# EAGLE board supply LF (tugas nanang) (EAGLE 7.5.0)
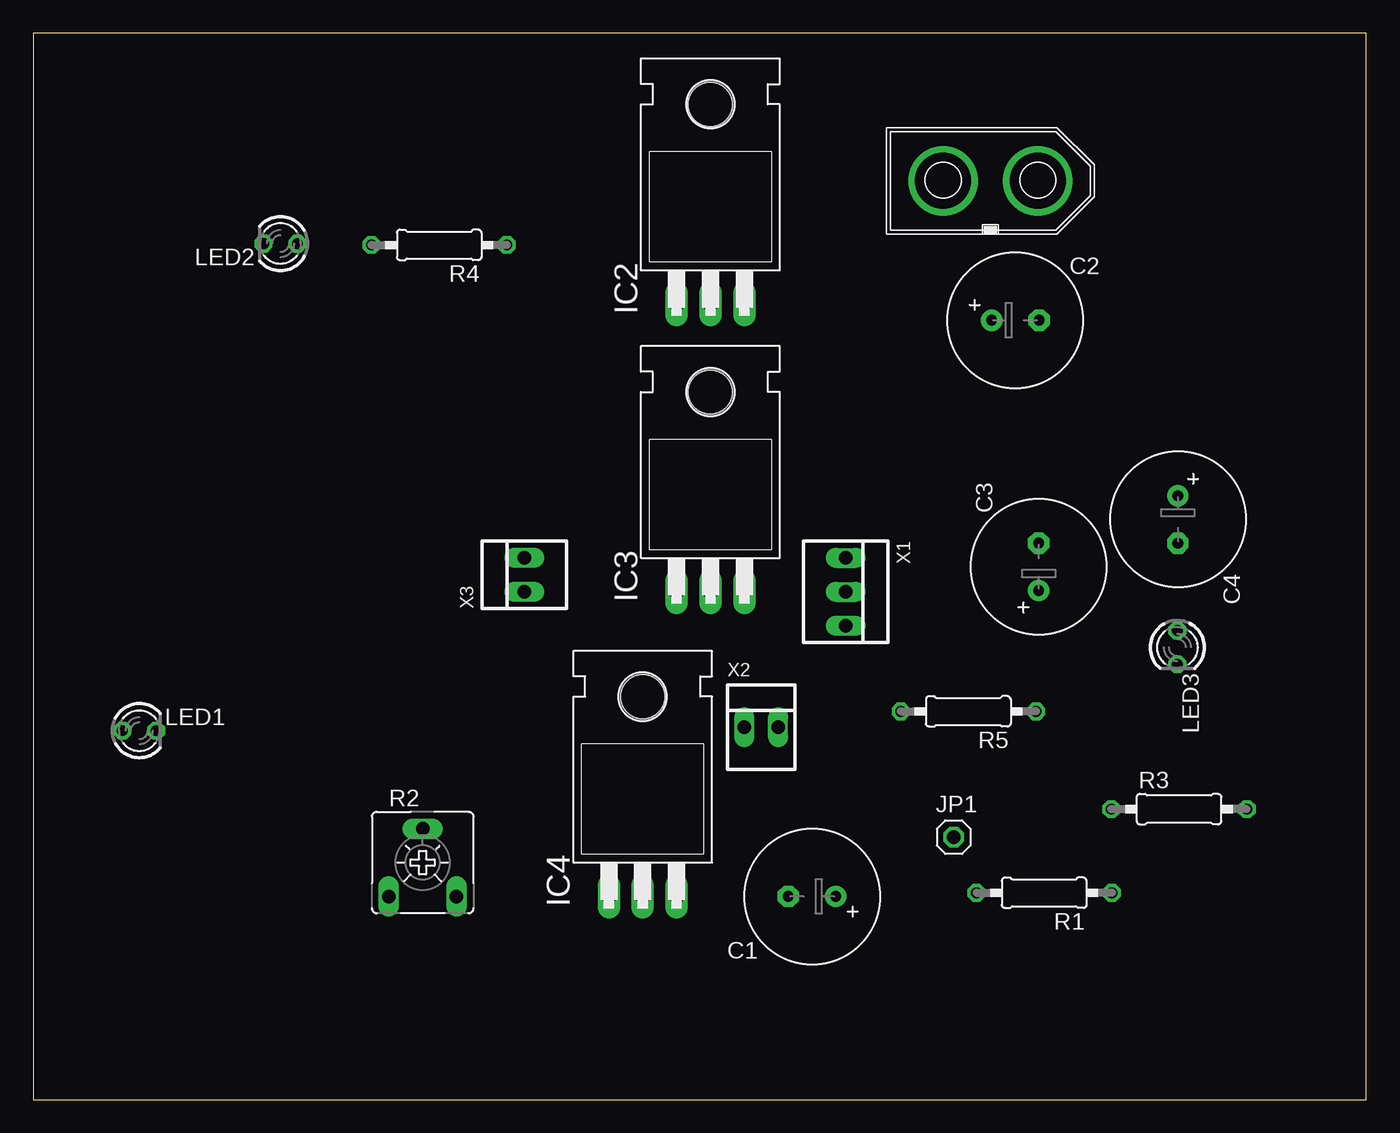
[diagram p0: board, top side]
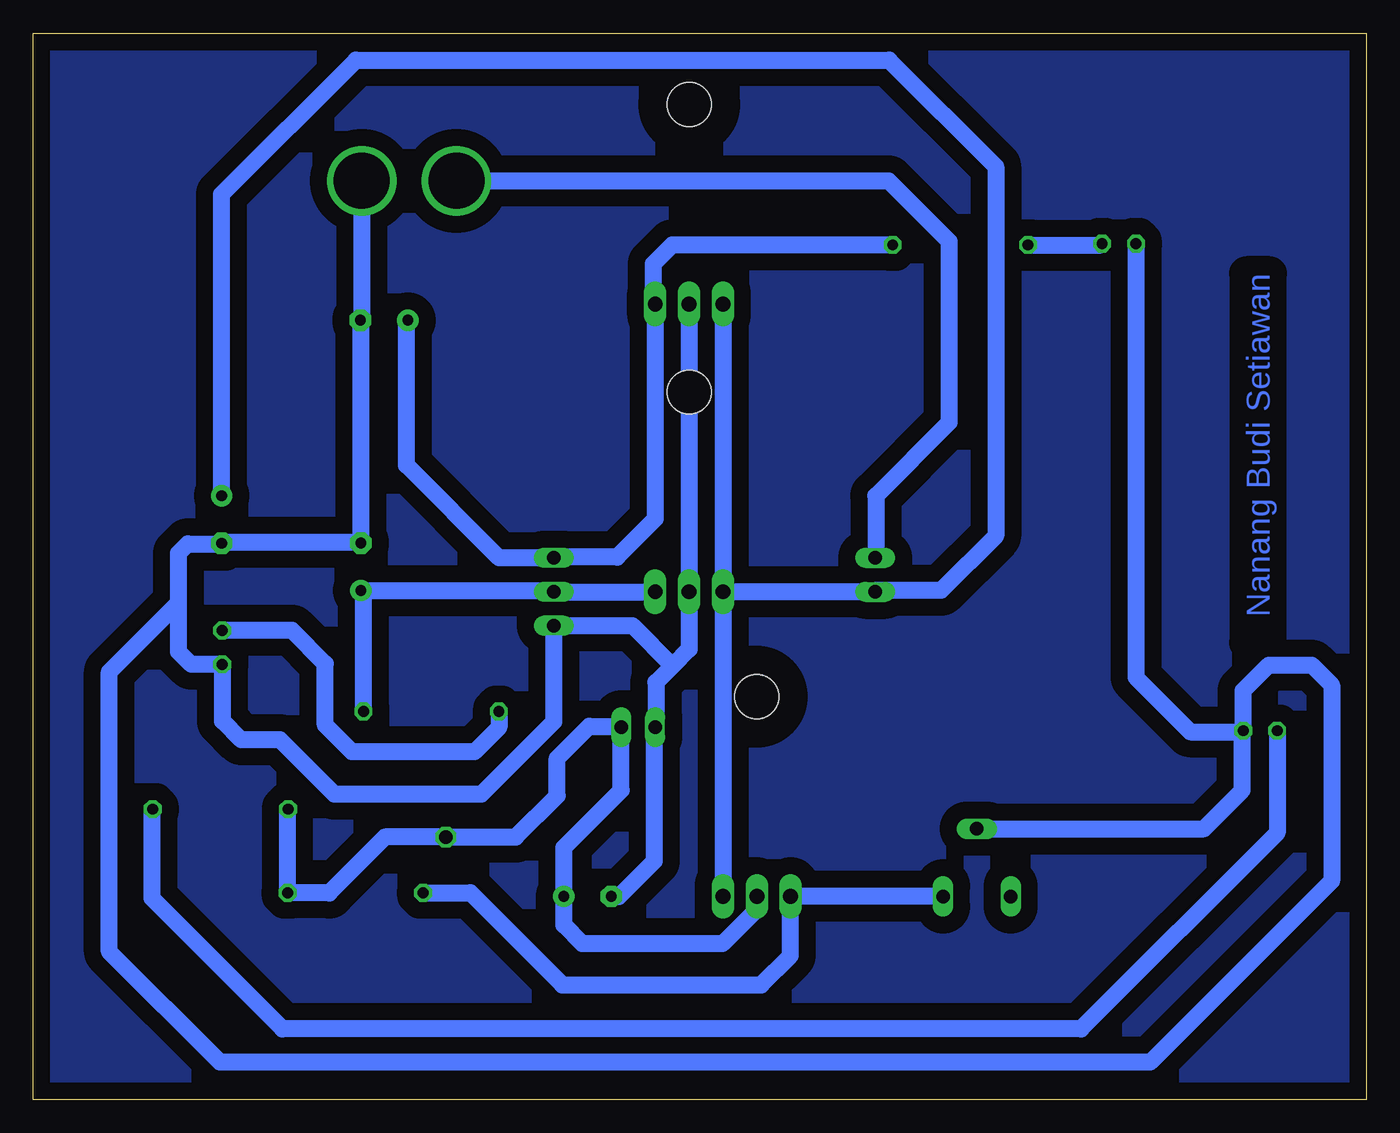
[diagram p1: board, bottom side, seen from below]

Size 100 x 80 mm. Coordinates in mm from the lower left corner, seen from the top.
Outline: 0,0 100,0 100,80 0,80 0,0
Copper layers (1*16): Top 0.035mm / dielectric 1.5mm / Bottom 0.035mm
Design rules "default": minimum track width 10mil, minimum drill 24mil, track to track 8mil, track to pad 8mil, pad to pad 8mil, via to via 8mil, smd to smd 8mil, copper to edge 40mil, drill to drill 8mil, minimum pad ring 10mil, minimum via ring 8mil, stop-mask expansion 4mil, vias tented up to drill 0mil, thermal gap 10mil

## Footprints (pad centres in the part's own frame; a part is rotated, then mirrored left to right if it is on the bottom)
E3,5-10 = drill 0.813 pad 1.6: + -1.778,0 | drill 0.813 pad 1.6 octagon: - 1.778,0
TO220H = drill 1.118 long: 1 -2.54,-10.16; 2 0,-10.16; 3 2.54,-10.16 | hole 3.302: 0,4.826
1X01 = drill 1.016 octagon: 1 0,0
LED3MM = drill 0.813 octagon: A -1.27,0; K 1.27,0
0207/10 = drill 0.813 octagon: 1 -5.08,0; 2 5.08,0
CA6V = drill 1.016 long: A -2.54,-2.54; E 2.54,-2.54; S 0,2.54
CON-XT60M = drill 4.2: V+ -3.55,0; V- 3.55,0
22-23-2031 = drill 1 long: 1 -2.54,0; 2 0,0; 3 2.54,0
22-23-2021 = drill 1 long: 1 -1.27,0; 2 1.27,0

## Placement (x,y rotation side)
C1  1000uF/16V  [E3,5-10]  58.42,15.24 180 top
C2  1000uF/16V  [E3,5-10]  73.68,58.47 0 top
C3  1000uF/16V  [E3,5-10]  75.43,39.97 90 top
C4  1000uF/16V  [E3,5-10]  85.87,43.52 270 top
IC2  7805T  [TO220H]  50.8,69.85 0 top
IC3  7805T  [TO220H]  50.8,48.26 0 top
IC4  317T  [TO220H]  45.72,25.4 0 top
JP1  [1X01]  69.05,19.69 0 top
LED1  [LED3MM]  7.95,27.68 0 top
LED2  [LED3MM]  18.54,64.22 180 top
LED3  [LED3MM]  85.83,33.92 270 top
R1  1K2  [0207/10]  75.84,15.51 180 top
R2  20K  [CA6V]  29.21,17.78 0 top
R3  1K  [0207/10]  85.96,21.79 0 top
R4  1K  [0207/10]  30.45,64.12 180 top
R5  1K  [0207/10]  70.15,29.12 180 top
VIN  [CON-XT60M]  71.81,68.93 0 top
X1  VSYS  [22-23-2031]  60.96,38.1 270 top
X2  VMOT  [22-23-2021]  54.61,27.94 0 top
X3  switch  [22-23-2021]  36.83,39.37 90 top

## Library data of the parts
C1-C4 R1 R3-R5 = rcl
IC2-IC4 = linear
JP1 = pinhead
LED1-LED3 = led
R2 = pot
VIN = con-XT60M
X1 = con-molex; MF: MOLEX; MPN: 22-23-2031; OC_FARNELL: 1462950; OC_NEWARK: 30C0862
X2 X3 = con-molex; MF: MOLEX; MPN: 22-23-2021; OC_FARNELL: 1462926; OC_NEWARK: 25C3832

## Nets
+12V: C3.+ IC3.3 R5.1 X1.2
GND: C1.- C2.- C3.- C4.- IC2.2 IC3.2 LED1.K LED2.K LED3.K R2.S VIN.V- X1.3 X2.1
N$1: IC4.1 R1.2 R2.E
N$2: LED1.A R3.2
N$3: LED3.A R5.2
N$4: VIN.V+ X3.2
N$5: LED2.A R4.2
VCC: C2.+ IC2.3 R4.1 X1.1
VDD: C1.+ IC4.2 JP1.1 R1.1 R3.1 X2.2
VPP: C4.+ IC2.1 IC3.1 IC4.3 X3.1

## Tracks (layer width: path | path; a pad name or v marks a point on that pad's centre or on a via)
+12V
  Bottom 1.27: IC3.3 X1.2 61.05,38.19 C3.+ 75.23,37.99 R5.1
GND
  Bottom 1.27: IC2.2 IC3.2 50.8,33.8 52.05,32.55 | 52.05,32.55 53.3,31.3 53.3,27.98 X2.1 53.4,27.88 53.4,17.9 56.06,15.24 C1.- | 52.05,32.55 55.06,35.56 X1.3 60.96,28.34 66.4,22.9 77.4,22.9 81.5,27 84.4,27 85.8,28.4 85.8,32.62 LED3.K 88.15,32.65 89.1,33.6 89.1,37.3 | VIN.V- 75.36,58.57 C2.- 75.46,41.78 | 75.46,41.78 C3.- | R2.S 12.18,20.32 9.3,23.2 9.3,27.6 | 75.46,41.78 85.84,41.78 C4.- 85.91,41.7 88.4,41.7 89.1,41 89.1,37.3 | 89.1,37.3 94.3,32.1 94.3,11.1 86,2.8 16.2,2.8 2.6,16.4 2.6,31.1 4.1,32.6 7.3,32.6 9.22,30.68 LED1.K 9.3,27.6 | LED2.K 17.27,31.67 13.2,27.6 9.3,27.6
N$1
  Bottom 1.27: R2.E IC4.1 43.2,15.22 43.2,10.8 45.4,8.6 60.3,8.6 67.21,15.51 R1.2
N$2
  Bottom 1.27: LED1.A 6.68,20.02 21.4,5.3 81.3,5.3 91.1,15.1 91.1,21.73 R3.2
N$3
  Bottom 1.27: R5.2 65.07,27.93 66.9,26.1 76.1,26.1 78.1,28.1 78.1,32.7 80.6,35.2 LED3.A
N$4
  Bottom 1.27: VIN.V+ 35.83,68.93 31.3,64.4 31.3,50.8 36.8,45.3 36.8,40.67 X3.2
N$5
  Bottom 1.27: R4.2 19.91,64.12 LED2.A
N$6
  pour Bottom (isolate 1.27): 0,80 100,80 100,0 0,0
VCC
  Bottom 1.27: C2.+ 72,58.37 72,47.6 65.04,40.64 X1.1 60.9,40.7 56.2,40.7 53.34,43.56 IC2.3 53.5,59.85 53.5,62.7 52.08,64.12 R4.1
VDD
  Bottom 1.27: IC4.2 45.72,14.28 48.3,11.7 58.8,11.7 60.2,13.1 C1.+ 60.2,18.9 55.9,23.2 55.9,27.92 X2.2 55.94,28 58.3,28 60.7,25.6 60.7,22.8 63.81,19.69 JP1.1 73.61,19.69 77.8,15.5 R1.1 80.92,21.75 R3.1
VPP
  Bottom 1.27: IC2.1 IC3.1 | IC3.1 IC4.3 | IC3.1 X3.1 36.73,38.2 31.9,38.2 27.8,42.3 27.8,70 35.8,78 75.8,78 85.87,67.93 C4.+

## Text on the board
Bottom: Nanang Budi Setiawan